# EAGLE board sensor  (EAGLE 7.6.0)
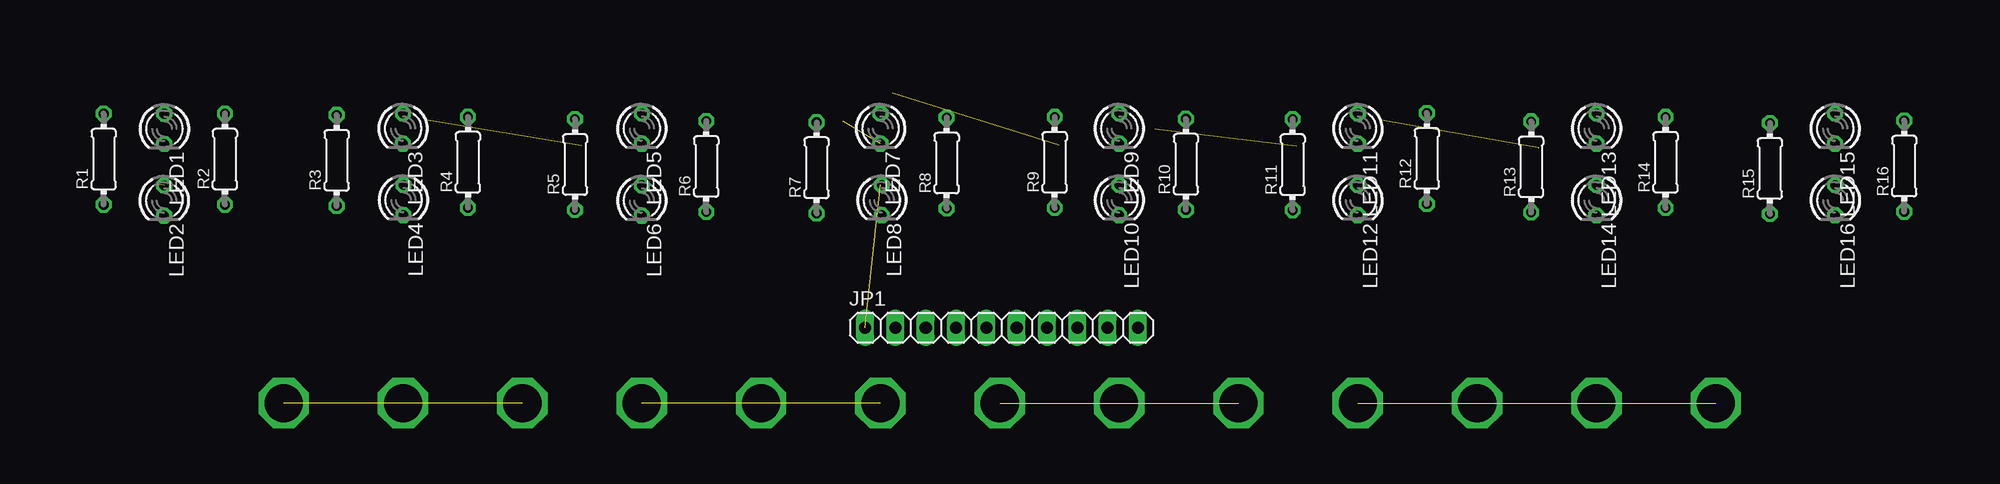
[diagram p0: board, top side]
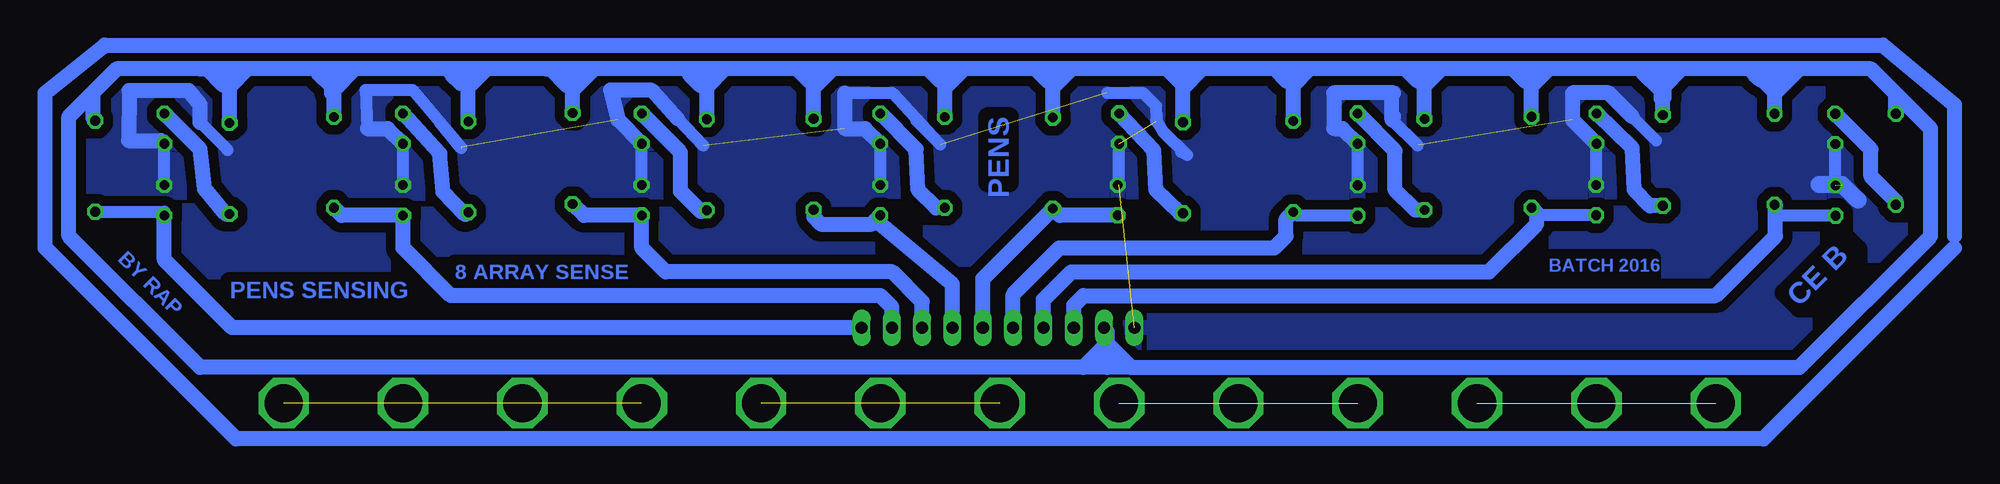
[diagram p1: board, bottom side, seen from below]

No outline drawn. Coordinates in mm, seen from the top.
Copper layers (1*16): Top 0.035mm / dielectric 1.5mm / Bottom 0.035mm
Design rules "default": minimum track width 10mil, minimum drill 24mil, track to track 8mil, track to pad 8mil, pad to pad 8mil, via to via 8mil, smd to smd 8mil, copper to edge 40mil, drill to drill 8mil, minimum pad ring 10mil, minimum via ring 8mil, stop-mask expansion 4mil, vias tented up to drill 0mil, thermal gap 10mil

## Footprints (pad centres in the part's own frame; a part is rotated, then mirrored left to right if it is on the bottom)
1X10 = drill 1.016 long: 1 -11.43,0; 2 -8.89,0; 3 -6.35,0; 4 -3.81,0; 5 -1.27,0; 6 1.27,0; 7 3.81,0; 8 6.35,0; 9 8.89,0; 10 11.43,0
LED3MM = drill 0.813 octagon: A -1.27,0; K 1.27,0
0204/7 = drill 0.813 octagon: 1 -3.81,0; 2 3.81,0

## Placement (x,y rotation side)
JP1  [1X10]  10.31,6.32 0 top
LED1  [LED3MM]  -59.84,22.97 270 top
LED2  [LED3MM]  -59.86,16.97 270 top
LED3  [LED3MM]  -39.84,23 270 top
LED4  [LED3MM]  -39.82,17.01 270 top
LED5  [LED3MM]  -19.84,23 270 top
LED6  [LED3MM]  -19.84,16.97 270 top
LED7  [LED3MM]  0.16,23 270 top
LED8  [LED3MM]  0.27,17 270 top
LED9  [LED3MM]  20.16,23 270 top
LED10  [LED3MM]  20.17,17 270 top
LED11  [LED3MM]  40.16,23 270 top
LED12  [LED3MM]  40.16,17 270 top
LED13  [LED3MM]  60.16,23 270 top
LED14  [LED3MM]  60.16,16.99 270 top
LED15  [LED3MM]  80.16,23 270 top
LED16  [LED3MM]  80.16,17 270 top
R1  1K  [0204/7]  -64.92,20.43 90 top
R2  22K  [0204/7]  -54.76,20.43 90 top
R3  1K  [0204/7]  -45.4,20.34 90 top
R4  22k  [0204/7]  -34.4,20.18 90 top
R5  1K  [0204/7]  -25.43,19.99 90 top
R6  22k  [0204/7]  -14.43,19.83 90 top
R7  1K  [0204/7]  -5.19,19.71 90 top
R8  22K  [0204/7]  5.71,20.11 90 top
R9  1k  [0204/7]  14.76,20.17 90 top
R10  22k  [0204/7]  25.76,20.01 90 top
R11  1k  [0204/7]  34.7,19.97 90 top
R12  22k  [0204/7]  45.95,20.49 90 top
R13  1k  [0204/7]  54.69,19.79 90 top
R14  22k  [0204/7]  65.95,20.17 90 top
R15  1k  [0204/7]  74.69,19.65 90 top
R16  22k  [0204/7]  85.95,19.85 90 top

## Library data of the parts
JP1 = pinhead
LED1-LED16 = led
R1-R16 = resistor

## Nets
GND: JP1.1 LED1.K LED2.A LED3.K LED4.A LED5.K LED6.A LED7.K LED8.A LED9.K LED10.A LED11.K LED12.A LED13.K LED14.A LED15.K LED16.A
N$1: LED3.A R3.1
N$2: LED1.A R1.1
N$3: LED5.A R5.1
N$4: LED7.A R7.1
N$5: LED9.A R9.1
N$6: LED11.A R11.1
N$7: LED13.A R13.1
N$8: LED15.A R15.1
OUT1: JP1.3 LED2.K R2.1
OUT2: JP1.4 LED4.K R4.1
OUT3: JP1.5 LED6.K R6.1
OUT4: JP1.6 LED8.K R8.1
OUT5: JP1.7 LED10.K R10.1
OUT6: JP1.8 LED12.K R12.1
OUT7: JP1.9 LED14.K R14.1
OUT8: JP1.10 LED16.K R16.1
VCC: JP1.2 R1.2 R2.2 R3.2 R4.2 R5.2 R6.2 R7.2 R8.2 R9.2 R10.2 R11.2 R12.2 R13.2 R14.2 R15.2 R16.2

## Tracks (layer width: path | path; a pad name or v marks a point on that pad's centre or on a via)
GND  (8 unrouted)
  Bottom 1.016: -42.84,24 -44.84,22 | -22.72,23.73 -24.86,21.59 | 17.16,23.68 15.32,21.84 | 15.32,21.84 15.13,21.65 | 37.16,23.83 35.01,21.56 | 57.11,23.61 55.29,21.36 | 77.16,23.51 74.85,21.2 | 63.16,23 63.3,26.23 59.37,26.23 55.3,21.45 | LED2.A -59.84,18.24 LED1.K | LED4.A -39.84,18.28 LED3.K | LED6.A -19.84,21 LED5.K | LED8.A 0.16,18.27 LED7.K | LED10.A LED9.K | LED12.A LED11.K | LED14.A LED13.K | LED16.A LED15.K 80.16,22 | 1.16,26 -1.84,26 -2.95,24.89 -2.97,23.71 -2.97,23.61 -3.49,22.81 -5.57,20.78 -5.05,21.05 | 23.16,26 19.16,26 15.32,21.84
  Bottom 1.27: -22.84,24 -22.72,23.73 -22.72,25.88 -22.84,26 -17.84,26 -17.84,23 -18.57,23 LED5.K | 37.16,23.83 39.31,26.19 42.78,26.23 42.16,23.73 LED11.K | -42.84,24 -40.84,26 -37.84,26 -37.84,23.74 LED3.K | 23.16,26 23.16,23 21.43,23 LED9.K | 63.16,23 61.43,23 LED13.K | 77.16,23.51 77.16,25 78.12,26.18 83.12,26.18 83.16,22 80.43,22 LED15.K
  Bottom 1.422: -61.75,17 -60.43,18.31 -58.48,18.31
  pour Bottom (isolate 0.813): -67.84,3 90.16,3 89.16,28 -67.84,28
N$1
  Bottom 1.27: R3.1 -44.31,16.53 -42.99,17.88 -42.84,21.36 LED3.A
N$2
  Bottom 1.27: R1.1 -64.92,16.92 -62.84,19 -62.84,21.25 LED1.A
N$3
  Bottom 1.27: R5.1 -24.66,16.18 -22.96,17.85 -22.96,21.12 LED5.A
N$4
  Bottom 1.27: R7.1 -4.94,15.9 -2.94,17.83 -2.74,21.17 LED7.A
N$5
  Bottom 1.27: R9.1 15.52,16.36 17.01,17.84 17.16,21.27 LED9.A
N$6
  Bottom 1.27: R11.1 35.2,16.04 36.92,17.73 36.92,21 LED11.A
N$7
  Bottom 1.27: R13.1 54.95,15.79 56.82,17.7 57.07,20.93 LED13.A
N$8
  Bottom 1.27: R15.1 75,15.84 76.79,17.95 77.16,21.27 LED15.A
N$19
  Bottom 1.27: 74.16,-3 90.16,13 90.16,26 85.16,30 -63.84,30 -69.84,25 -69.84,14
N$20
  Bottom 1.27: -45.51,25.59 -45.51,26.52 -46.86,27.88
N$21
  Bottom 1.27: -45.26,25.52 -45.26,26.13 -43.65,27.74
N$22  (via drill 3.2)  (2 unrouted)
  other vias: 10.16,0 20.16,0 30.16,0
N$23  (via drill 3.2)  (3 unrouted)
  other vias: 40.16,0 50.16,0 60.16,0 70.16,0
N$24  (via drill 3.2)  (2 unrouted)
  other vias: -49.84,0 -39.84,0 -29.84,0
N$25  (via drill 3.2)  (2 unrouted)
  other vias: -19.84,0 -9.84,0 0.16,0
N$26
  Bottom 1.27: -69.84,13 -53.84,-3 74.16,-3
N$27
  Bottom 1.27: 66.16,26 66.16,26.48 67.26,27.58
OUT1
  Bottom 1.016: LED2.K -55.14,15.7 -54.84,16
  Bottom 1.27: JP1.3 3.96,8.2 3.16,9 -49.84,9 -54.84,14 -54.84,16 -54.84,16.55 R2.1
OUT2
  Bottom 1.016: LED4.K -35.03,15.74 -34.8,15.96
  Bottom 1.27: JP1.4 6.5,8.66 4.16,11 -30.84,11 -34.84,15 -34.84,15.93 -34.8,15.96 R4.1
OUT3
  Bottom 1.016: LED6.K -14.74,15.71 R6.1
  Bottom 1.27: JP1.5 9.04,9.12 5.16,13 -12.84,13 -13.84,14 -13.84,15.43 R6.1
OUT4
  Bottom 1.27: JP1.6 11.58,10.43 R8.1 5.15,15.73 LED8.K
OUT5
  Bottom 1.27: JP1.7 14.12,9.96 20.16,15 LED10.K 20.9,15 25.16,15 25.76,15.6 R10.1
OUT6
  Bottom 1.27: JP1.8 16.66,8.5 19.16,11 38.16,11 40.16,13 LED12.K 45,15.73 R12.1
OUT7
  Bottom 1.27: JP1.9 19.2,8.04 20.16,9 56.16,9 60.16,13 LED14.K 65.31,15.72 R14.1
OUT8
  Bottom 1.016: R16.1 80.16,16.04 LED16.K
  Bottom 1.27: JP1.10 74.48,6.32 80.16,12 LED16.K
VCC
  Bottom 1.27: 1.16,6 1.16,5 -0.84,3 | -0.84,3 -56.84,3 -67.84,14 -67.84,23 -64.92,25.92 | R1.2 -64.92,25.92 | -64.92,25.92 -62.84,28 -56.84,28 | -56.84,28 -54.84,28 | -54.84,28 -52.84,28 | -52.84,28 -45.84,28 | -45.84,28 -35.84,28 | -35.84,28 -34.84,28 | -34.84,28 -32.84,28 | -32.84,28 -26.84,28 | -26.84,28 -25.84,28 | -25.84,28 -23.84,28 | -23.84,28 -15.84,28 | -15.84,28 -14.84,28 | -14.84,28 -12.84,28 | -12.84,28 -6.84,28 | -6.84,28 -4.84,28 | -4.84,28 -3.84,28 | -3.84,28 4.16,28 | 4.16,28 5.16,28 | 5.16,28 7.16,28 | 7.16,28 13.16,28 | 13.16,28 14.16,28 | 14.16,28 16.16,28 | 16.16,28 24.16,28 | 24.16,28 25.16,28 | 25.16,28 27.16,28 | 27.16,28 33.16,28 | 33.16,28 35.16,28 | 35.16,28 36.16,28 | 36.16,28 44.16,28 | 44.16,28 45.16,28 | 45.16,28 48.16,28 | 48.16,28 53.16,28 | 53.16,28 54.16,28 | 54.16,28 55.16,28 | 55.16,28 56.16,28 | 56.16,28 64.16,28 | 64.16,28 66.16,28 | 66.16,28 73.16,28 | 73.16,28 75.16,28 | 75.16,28 77.16,28 | 77.16,28 84.16,28 86.16,26 | R2.2 -54.76,26.92 -54.84,27 -54.84,28 | R3.2 -45.4,27.56 -45.84,28 | -34.4,27.56 -34.84,28 | -25.43,27.59 -25.84,28 | -14.43,27.59 -14.84,28 | -5.19,27.65 -4.84,28 | 5.71,27.45 5.16,28 | 14.76,27.4 14.16,28 | 34.76,27.6 35.16,28 | 45.95,27.21 45.16,28 | 25.76,27.4 25.16,28 | 54.95,27.79 55.16,28 | 65.95,27.79 66.16,28 | -56.84,28 -54.84,26 -53.84,27 arc60 -52.84,28 | 86.16,26 86.16,24 | 86.16,24 86.16,23.87 R16.2 85.95,23.79 86.16,24 | 54.69,27.47 54.16,28 | 74.69,27.53 75.16,28 | JP1.2 1.42,4.74 3.16,3 | 3.16,3 77.16,3 88.16,14 88.16,24 86.16,26 | -0.84,3 1.16,3 | 1.16,3 3.16,3 | 1.16,3 1.16,4 | R4.2 -34.4,26.56 -35.84,28 | R5.2 -25.43,26.59 -26.84,28 | R6.2 -14.43,26.59 -15.84,28 | R7.2 -5.19,26.35 -6.84,28 | R8.2 5.71,26.45 4.16,28 | R9.2 14.76,26.4 13.16,28
  Bottom 1.27: R10.2 25.76,26.4 24.16,28 | R11.2 34.7,26.46 33.16,28 | R12.2 45.95,26.21 44.16,28 | R13.2 54.69,26.47 53.16,28 | R14.2 65.95,26.21 64.16,28 | R15.2 74.69,26.47 73.16,28 | -32.84,28 -33.84,27 | -23.84,28 -24.84,27 | -12.84,28 -13.84,27 | -3.84,28 -4.84,27 | 7.16,28 6.16,27 | 16.16,28 15.16,27 | 27.16,28 26.16,27 | 36.16,28 36.16,27.51 35.26,26.61 | 48.16,28 47.84,28 46.4,26.56 | 56.16,28 56.16,27.59 55.34,26.78 | 77.16,28 76.62,28 75.25,26.63

## Text on the board
Bottom: PENS | BY RAP | BATCH 2016 | 8 ARRAY SENSE | PENS SENSING | CE B